# Altium PCB ThermalCamV1_1.PcbDoc
Units mm, origin at the board's own origin, x right, y up, seen from the top; angles counter-clockwise.
Board outline 42.25 x 58 mm, 2 copper layers (Top Layer, Bottom Layer), stack 1.571 mm thick; 11 components, 10 nets, 64 pads, 723 vias.
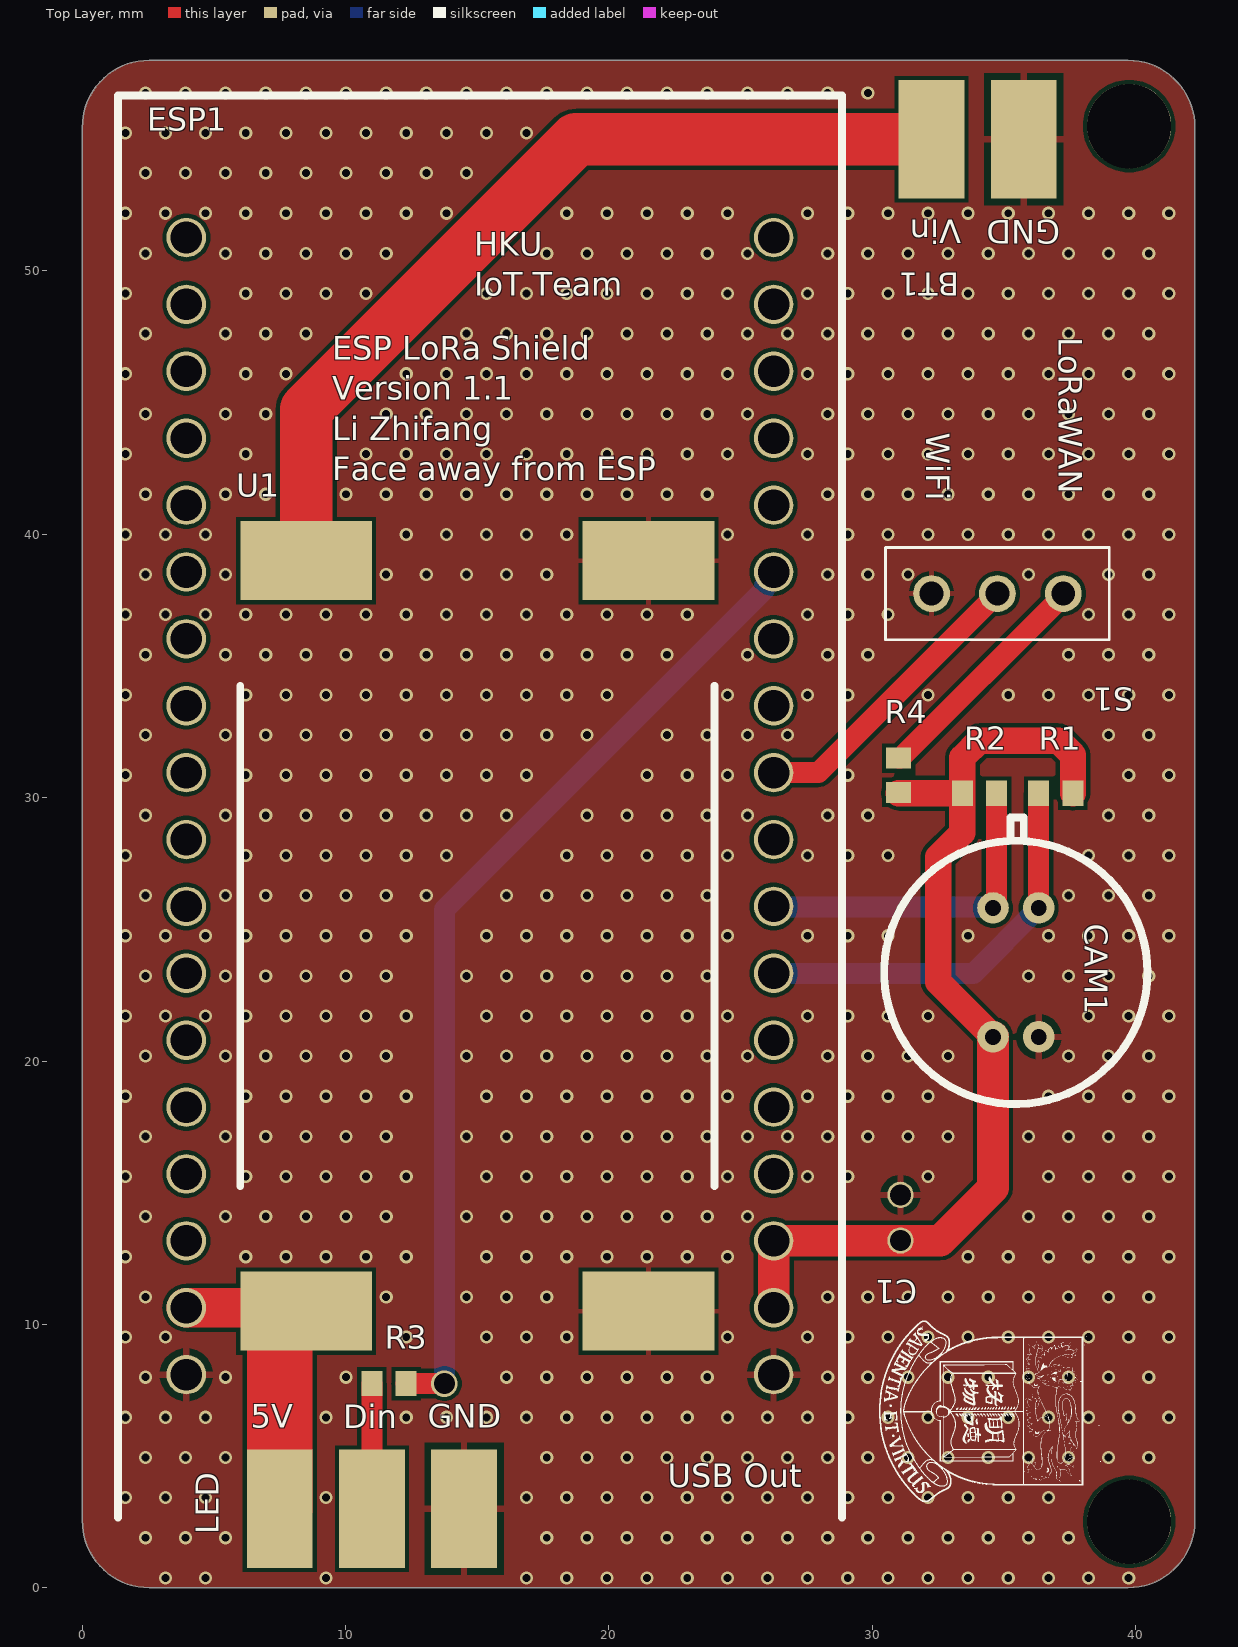
[diagram p0: Top Layer view]
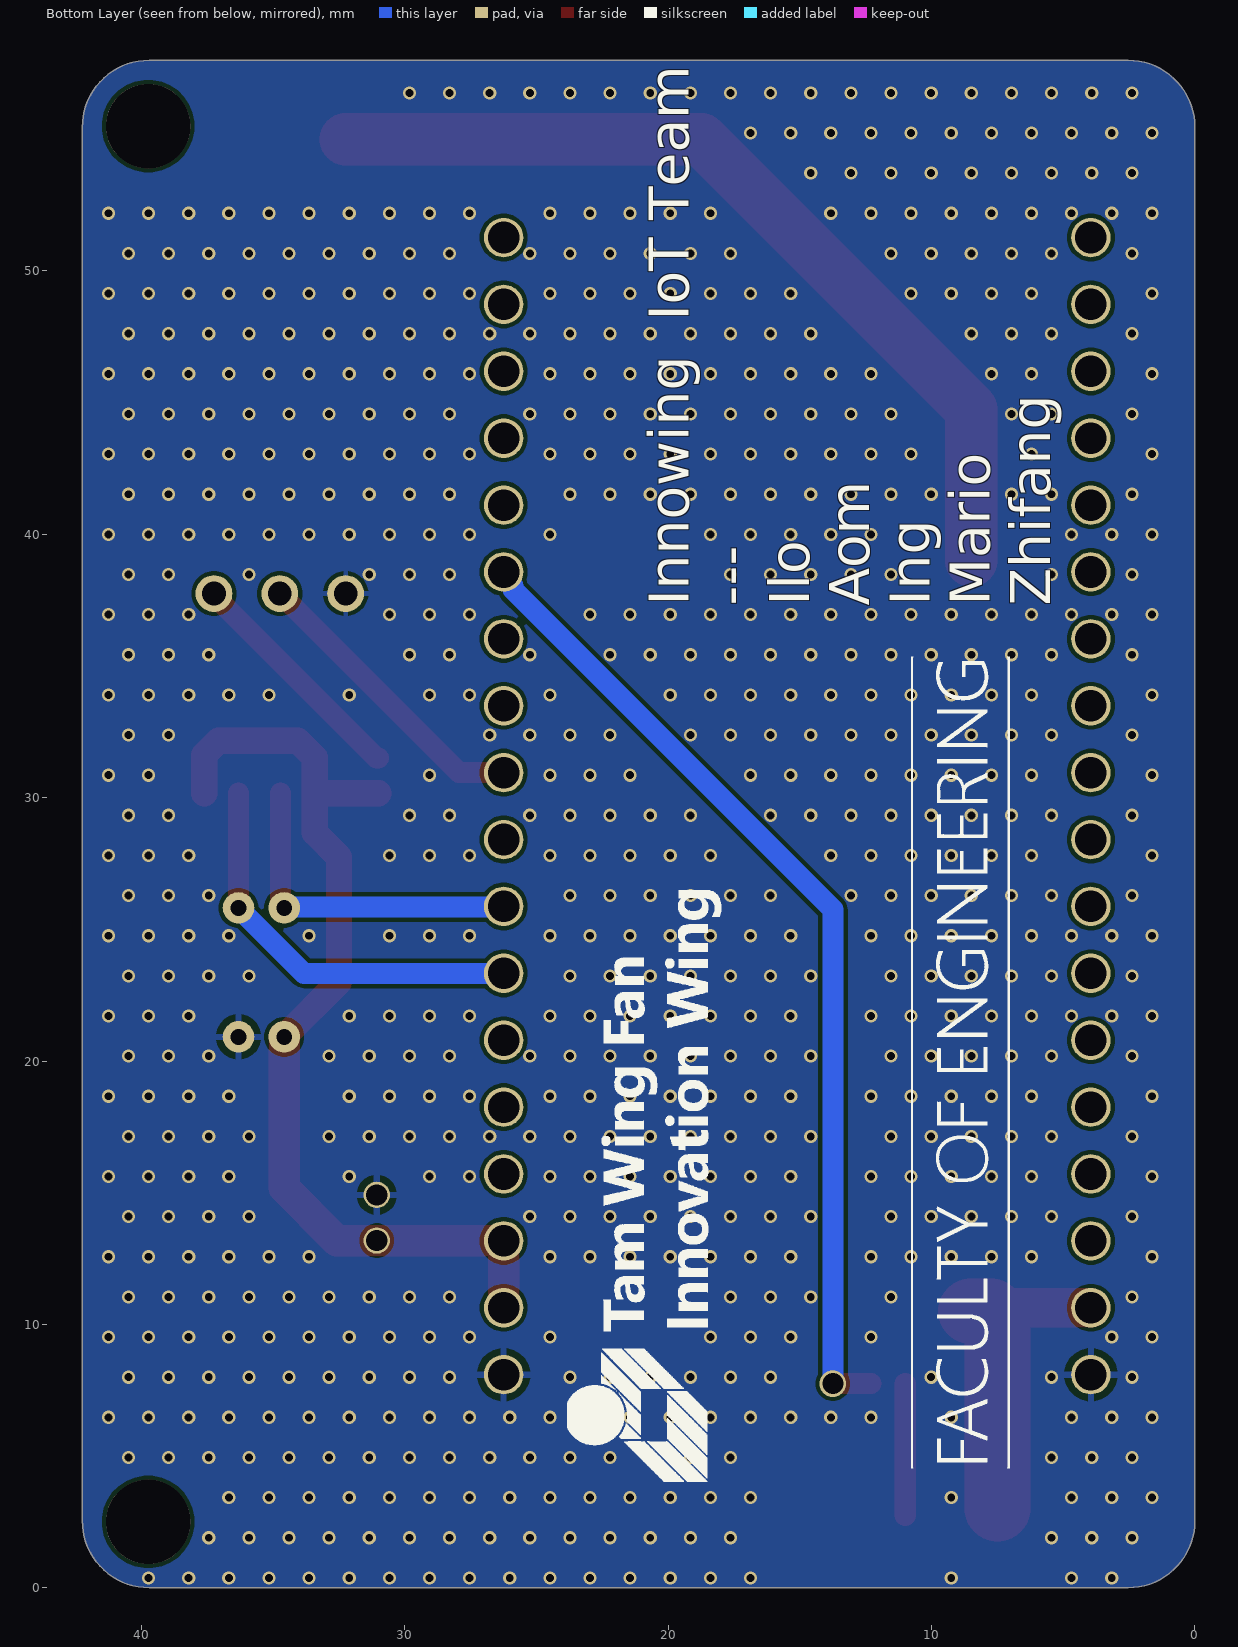
[diagram p1: Bottom Layer view, seen from below]

## Layer stack, top to bottom
Top Solder: solder mask 0.0102, Solder Resist, Dk 3.5
Top Layer: signal copper 0.0356
Dielectric 1: dielectric 1.5, FR-4, Dk 4.8
Bottom Layer: signal copper 0.0356
Bottom Solder: solder mask 0.0102, Solder Resist, Dk 3.5

## Board outline
0,2.54 0,55.46 cw(c2.54,55.46) 2.54,58 39.71,58 cw(c39.71,55.46) 42.25,55.46 42.25,2.54 cw(c39.71,2.54) 39.71,0 2.54,0 cw(c2.54,2.54)

## Design rules (kind name [scope] priority, off if disabled: settings)
Clearance [All] p1: gap=0.15 ignorepadtopadclearanceinfootprint=FALSE
ComponentClearance [All] p1: gap=0 collisioncheckmode=3 verticalgap=0.254 showdistances=FALSE
DiffPairsRouting [All] p1: maxlimit=1 minlimit=0.127 mostfreqgap=0.2 toplayer_minwidth=0.127 toplayer_maxwidth=0.2 toplayer_prefwidth=0.2 bottomlayer_minwidth=0.127 bottomlayer_maxwidth=0.2 bottomlayer_prefwidth=0.2 maxuncoupledlength=12.7
Height ESP_Shield [InComponent('No Component')] p1: minheight=0 maxheight=0 prefheight=0
Height [All] p2: minheight=0 maxheight=500 prefheight=12.7
HoleSize [All] p1: absolutevalues=TRUE maxlimit=6.3 minlimit=0.025 maxpercent=80.000 minpercent=20.000
MinimumSolderMaskSliver [All] p1: minsoldermaskwidth=0.04
PolygonConnect CertainComponents [InComponent('C0','C00') vs InNet('GND')] p1: connectstyle=Direct reliefconductorwidth=0.2 reliefentries=4 polygonreliefangle="90 Angle" airgapwidth=0.2 // force certain component to be conencted with relieft connection
PolygonConnect GND [InNet('GND')] p2: thpad.connectstyle=Relief thpad.reliefconductorwidth=0.2 thpad.reliefentries=4 thpad.polygonreliefangle="90 Angle" thpad.airgapwidth=0.15 smdpad.connectstyle=Relief smdpad.reliefconductorwidth=0.2 smdpad.reliefentries=4 smdpad.polygonreliefangle="90 Angle" smdpad.airgapwidth=0.15 via.connectstyle=Direct via.reliefconductorwidth=0.254 via.reliefentries=4 via.polygonreliefangle="90 Angle" via.airgapwidth=0.254
PolygonConnect [All] p3: connectstyle=Direct reliefconductorwidth=0.3 reliefentries=4 polygonreliefangle="90 Angle" airgapwidth=0.127
RoutingVias [All] p1: holewidth=0.3 width=0.5 viastyle="Through Hole" minholewidth=0.3 minwidth=0.5 maxholewidth=6 maxwidth=6.3
SilkToSilkClearance [All] p1: silktosilkclearance=0.04
SilkToSolderMaskClearance [IsPad] p1: minsilkscreentomaskgap=0.102 clearancetoexposedcopper=TRUE
SolderMaskExpansion [All] p1: expansion=0.102 istentingtop=FALSE
SupplyNets "Schematic Supply Nets_4" [InNet('Vin')] p1: voltage=0.000
SupplyNets "Schematic Supply Nets_3" [InNet('Din')] p2: voltage=0.000
SupplyNets "Schematic Supply Nets_2" [InNet('5V')] p3: voltage=0.000
SupplyNets "Schematic Supply Nets_1" [InNet('GND')] p4: voltage=0.000
SupplyNets "Schematic Supply Nets" [InNet('3V3')] p5: voltage=0.000
Width [All] p1: maxlimit=3 minlimit=0.127 preferedwidth=0.2
23 further rules are at their usual default settings.

## Components (designator, comment, footprint, x,y, rotation, side; value= is the part's Value field where it differs from the comment)
BT1 "Battery Pack" "Battery Pads" 34,55 r0 top
C1 "THT_Capacitor_2.54mm" THT_Capacitor_2.54mm_Small 31.033,14.05 r180 top
CAM1 "MLX90640" MLX90640 35.45,23.365 r90 top
ESP1 "ESP32 LoRa Board" "ESP32 LoRa Board" 15.1,29.67 r0 top
LED "LED Strip" "LED Strip" 11,3 r0 top (schematic designator J1)
R1 "10kΩ 0603" RESC1609X50X30NL8T20 36.967,30.168 r180 top
R2 "10kΩ 0603" RESC1609X50X30NL8T20 34.067,30.168 r180 top
R3 "220Ω 0603" RESC1609X50X30NL8T20 11.65,7.75 r180 top
R4 "10kΩ 0603" RESC1609X50X30NL8T20 31,30.85 r90 top
S1 "SS12D00G3" SS12D00G3 34.75,37.75 r0 top
U1 "Buck Converter" BuckConverter 15,24.75 r270 top

## Footprints (in the part's own frame and the unit in brackets; to place one, negate y for a bottom-side part, rotate by r counter-clockwise, add the part's x,y. Pads: shape width x height; smd on the part's side, far side on the other; paste and mask are expansions set on the pad)
"Battery Pads" [mm]
  rect 2.5x4.5 smd: 1(-1.75,0) 2(1.75,0)
BuckConverter [mm]
  rect 3x5 smd: 1(-14.25,-6.5) 2(-14.25,6.5) 2(14.25,6.5) 3(14.25,-6.5)
  silkscreen extent -9.5,-9 9.5,9
"ESP32 LoRa Board" [mm]
  round 1.5 hole 1.2: 1(11.15,21.6) 2(-11.15,21.6) 3(11.15,19.06) 4(-11.15,19.06) 5(11.15,16.52) 6(-11.15,16.52) 7(11.15,13.98) 8(-11.15,13.98) 9(11.15,11.44) 10(-11.15,11.44) 11(11.15,8.9) 12(-11.15,8.9) 13(11.15,6.36) 14(-11.15,6.36) 15(11.15,3.82) 16(-11.15,3.82) 17(11.15,1.28) 18(-11.15,1.28) 19(11.15,-1.26) 20(-11.15,-1.26) 21(11.15,-3.8) 22(-11.15,-3.8) 23(11.15,-6.34) 24(-11.15,-6.34) 25(11.15,-8.88) 26(-11.15,-8.88) 27(11.15,-11.42) 28(-11.15,-11.42) 29(11.15,-13.96) 30(-11.15,-13.96) 31(11.15,-16.5) 32(-11.15,-16.5) 33(11.15,-19.04) 34(-11.15,-19.04) 35(11.15,-21.58) 36(-11.15,-21.58)
  silkscreen extent -13.75,-27 13.75,27
"LED Strip" [mm]
  rect 2.5x4.5 smd: 1(-3.5,0) 2(0,0) 3(3.5,0)
MLX90640 [mm]
  round 1.2 hole 0.6: 1(-2.448,0.867) 2(-2.448,-0.867) 3(2.448,0.867) 4(2.448,-0.867)
  silkscreen extent -5,-5 5,5
RESC1609X50X30NL8T20 [mm] "Chip Resistor, 2-Leads, Body 1.65x0.95mm, IPC Medium Density"
  rect 0.8x0.95 smd: 1(-0.65,0) 2(0.65,0)
  body extent -0.82,-0.48 0.82,0.48, height 0.5
SS12D00G3 [mm]
  round 1.4 hole 0.9: 1(-2.5,0) 2(0,0) 3(2.5,0)
  silkscreen extent -4.25,-1.75 4.25,1.75, body extent -4.25,-1.75 4.25,1.75, height 6.88
THT_Capacitor_2.54mm_Small [mm]
  round 1 hole 0.8: 1(-0.035,0.867) 2(-0.035,-0.867)

## Part data
R1 R2 R3 R4: library part CMP-2000-03816-5, "Chip Resistor, 0 Ohm, Jumper, 100 mW, -55 to 155 degC, 0603 (1608 Metric), RoHS, Tape and Reel", Manufacturer="Vishay Semiconductor", Max Operating Temperature="155 degC", Min Operating Temperature="-55 degC", Package Quantity=5000, Voltage Rating="75 V", ComponentLink1Description="Manufacturer URL", ComponentLink1URL=http://www.vishay.com/, ComponentLink2Description=Datasheet, ComponentLink2URL=http://www.vishay.com/docs/20035/dcrcwe3.pdf, DatasheetVersion=06/2012, Height="0.45 mm", Length="1.55 mm", Mount="Surface Mount", Mounting Technology="Surface Mount", PackageDescription="2-Pin Surface Mount Device, Body 1.575 x 0.85 mm", PackageReference=0603, Packaging="Tape and Reel", Pins=2, REACH SVHC=Unknown, RoHSCompliant=true
S1: "Switch", Manufacturer_Name=Vimex, Datasheet Link=http://vimex.com/switches/techdocs/SS12D00-tech.pdf, Height=7mm, Manufacturer_Part_Number=SS12D00G3

## Free pads (board coordinates)
  round 3.2 hole 3.2 unplated: 41(39.75,2.5) 42(39.75,55.5)

## Via types
v1: diameter 0.5, hole 0.3, Top Layer to Bottom Layer, tented both sides, 722 vias
v2: diameter 1, hole 0.8, Top Layer to Bottom Layer, tented both sides, 1 vias

## Nets (pads, with @x,y where several pads share a name; then routed paths per layer and width w, separated by ;. In a path a pad name is that pad's centre, name@x,y a point inside that pad or via, vN(x,y) a via of type N, cw(c..) or ccw(c..) an arc to the next point about the centre after c; other vN are vias at no path point)
3V3: C1.1 CAM1.1 ESP1.31 ESP1.33 R1.1 R2.2 R4.1 | length 37.8
  Top Layer w1: R4.1@31,30.168 R2.2 ; CAM1.1 32.5,23 32.5,27.75 33.417,28.667 R2.2 ; R1.1 37.617,31.617 37.067,32.167 34.067,32.167 33.417,31.518 R2.2
  Top Layer w1.2: ESP1.33 ESP1.31 26.263,13.183 C1.1 32.582,13.183 34.583,15.183 ; 34.583,15.25 CAM1.1
5V: ESP1.34 LED.1 U1.3 | length 12.5
  Top Layer w1.5: ESP1.34 U1.3@7.5,10.63 ; U1.3@7.5,9.75 U1.3@7.94,10.19
  Top Layer w2.5: LED.1 7.5,9.75 7.5,10.25 7.75,10.5 U1.3
Din: LED.2 R3.2 | length 5
  Top Layer w0.8: LED.2@11,2.75 LED.2 R3.2
GND: BT1.2 C1.2 CAM1.2 ESP1.35 ESP1.36 LED.3 S1.1 U1.2
  other v1: 3.158,0.374 4.682,0.374 9.254,0.374 16.874,0.374 18.398,0.374 19.922,0.374 21.446,0.374 22.97,0.374 24.494,0.374 26.018,0.374 27.542,0.374 29.066,0.374 30.59,0.374 32.114,0.374 33.638,0.374 35.162,0.374 36.686,0.374 38.21,0.374 39.734,0.374 2.396,1.898 3.92,1.898 5.444,1.898 17.636,1.898 19.16,1.898 20.684,1.898 22.208,1.898 23.732,1.898 25.256,1.898 26.78,1.898 28.304,1.898 29.828,1.898 31.352,1.898 32.876,1.898 34.4,1.898 35.924,1.898 37.448,1.898 1.634,3.422 3.158,3.422 4.682,3.422 9.254,3.422 16.874,3.422 18.398,3.422 19.922,3.422 21.446,3.422 22.97,3.422 24.494,3.422 26.018,3.422 27.542,3.422 29.066,3.422 30.59,3.422 32.114,3.422 33.638,3.422 35.162,3.422 36.686,3.422 2.396,4.946 3.92,4.946 5.444,4.946 17.636,4.946 19.16,4.946 20.684,4.946 22.208,4.946 23.732,4.946 25.256,4.946 26.78,4.946 28.304,4.946 29.828,4.946 31.352,4.946 32.876,4.946 34.4,4.946 35.924,4.946 37.448,4.946 38.972,4.946 40.496,4.946 1.634,6.47 3.158,6.47 4.682,6.47 9.254,6.47 12.302,6.47 13.826,6.47 15.35,6.47 16.874,6.47 18.398,6.47 19.922,6.47 21.446,6.47 22.97,6.47 24.494,6.47 26.018,6.47 27.542,6.47 29.066,6.47 30.59,6.47 32.114,6.47 33.638,6.47 35.162,6.47 36.686,6.47 38.21,6.47 39.734,6.47 41.258,6.47 2.396,7.994 5.444,7.994 10.016,7.994 16.112,7.994 17.636,7.994 19.16,7.994 20.684,7.994 22.208,7.994 23.732,7.994 28.304,7.994 29.828,7.994 31.352,7.994 32.876,7.994 34.4,7.994 35.924,7.994 37.448,7.994 38.972,7.994 40.496,7.994 1.634,9.518 3.158,9.518 12.302,9.518 15.35,9.518 16.874,9.518 18.398,9.518 24.494,9.518 27.542,9.518 29.066,9.518 30.59,9.518 32.114,9.518 33.638,9.518 35.162,9.518 36.686,9.518 38.21,9.518 39.734,9.518 41.258,9.518 2.396,11.042 11.54,11.042 14.588,11.042 16.112,11.042 17.636,11.042 28.304,11.042 29.828,11.042 31.352,11.042 32.876,11.042 34.4,11.042 35.924,11.042 37.448,11.042 38.972,11.042 40.496,11.042 1.634,12.566 6.206,12.566 7.73,12.566 9.254,12.566 10.778,12.566 12.302,12.566 15.35,12.566 16.874,12.566 18.398,12.566 19.922,12.566 21.446,12.566 22.97,12.566 24.494,12.566 33.638,12.566 35.162,12.566 36.686,12.566 38.21,12.566 39.734,12.566 41.258,12.566 2.396,14.09 5.444,14.09 6.968,14.09 8.492,14.09 10.016,14.09 11.54,14.09 14.588,14.09 16.112,14.09 17.636,14.09 19.16,14.09 20.684,14.09 22.208,14.09 23.732,14.09 25.256,14.09 35.924,14.09 37.448,14.09 38.972,14.09 40.496,14.09 1.634,15.614 6.206,15.614 7.73,15.614 9.254,15.614 10.778,15.614 12.302,15.614 15.35,15.614 16.874,15.614 18.398,15.614 19.922,15.614 21.446,15.614 22.97,15.614 24.494,15.614 27.542,15.614 29.066,15.614 32.114,15.614 36.686,15.614 38.21,15.614 39.734,15.614 41.258,15.614 2.396,17.138 5.444,17.138 6.968,17.138 8.492,17.138 10.016,17.138 11.54,17.138 14.588,17.138 16.112,17.138 17.636,17.138 19.16,17.138 20.684,17.138 22.208,17.138 23.732,17.138 25.256,17.138 26.78,17.138 28.304,17.138 29.828,17.138 31.352,17.138 32.876,17.138 35.924,17.138 37.448,17.138 38.972,17.138 40.496,17.138 1.634,18.662 6.206,18.662 7.73,18.662 9.254,18.662 10.778,18.662 12.302,18.662 15.35,18.662 16.874,18.662 18.398,18.662 19.922,18.662 21.446,18.662 22.97,18.662 24.494,18.662 27.542,18.662 29.066,18.662 30.59,18.662 32.114,18.662 36.686,18.662 38.21,18.662 39.734,18.662 41.258,18.662 2.396,20.186 5.444,20.186 6.968,20.186 8.492,20.186 10.016,20.186 11.54,20.186 14.588,20.186 16.112,20.186 17.636,20.186 19.16,20.186 20.684,20.186 22.208,20.186 23.732,20.186 25.256,20.186 28.304,20.186 29.828,20.186 31.352,20.186 32.876,20.186 37.448,20.186 38.972,20.186 40.496,20.186 1.634,21.71 3.158,21.71 4.682,21.71 6.206,21.71 7.73,21.71 9.254,21.71 10.778,21.71 12.302,21.71 15.35,21.71 16.874,21.71 18.398,21.71 19.922,21.71 21.446,21.71 22.97,21.71 24.494,21.71 27.542,21.71 29.066,21.71 30.59,21.71 32.114,21.71 38.21,21.71 39.734,21.71 41.258,21.71 2.396,23.234 5.444,23.234 6.968,23.234 8.492,23.234 10.016,23.234 11.54,23.234 14.588,23.234 16.112,23.234 17.636,23.234 19.16,23.234 20.684,23.234 22.208,23.234 23.732,23.234 35.924,23.234 37.448,23.234 38.972,23.234 40.496,23.234 1.634,24.758 3.158,24.758 4.682,24.758 6.206,24.758 7.73,24.758 9.254,24.758 10.778,24.758 12.302,24.758 15.35,24.758 16.874,24.758 18.398,24.758 19.922,24.758 21.446,24.758 22.97,24.758 24.494,24.758 27.542,24.758 29.066,24.758 30.59,24.758 33.638,24.758 36.686,24.758 38.21,24.758 39.734,24.758 41.258,24.758 2.396,26.282 5.444,26.282 6.968,26.282 8.492,26.282 10.016,26.282 11.54,26.282 13.064,26.282 16.112,26.282 17.636,26.282 19.16,26.282 20.684,26.282 22.208,26.282 23.732,26.282 37.448,26.282 38.972,26.282 40.496,26.282 1.634,27.806 6.206,27.806 7.73,27.806 9.254,27.806 10.778,27.806 12.302,27.806 13.826,27.806 18.398,27.806 19.922,27.806 21.446,27.806 22.97,27.806 24.494,27.806 27.542,27.806 29.066,27.806 30.59,27.806 38.21,27.806 39.734,27.806 41.258,27.806 2.396,29.33 5.444,29.33 6.968,29.33 8.492,29.33 10.016,29.33 11.54,29.33 13.064,29.33 14.588,29.33 16.112,29.33 19.16,29.33 20.684,29.33 22.208,29.33 23.732,29.33 25.256,29.33 28.304,29.33 29.828,29.33 38.972,29.33 40.496,29.33 1.634,30.854 6.206,30.854 7.73,30.854 9.254,30.854 10.778,30.854 12.302,30.854 13.826,30.854 15.35,30.854 16.874,30.854 21.446,30.854 22.97,30.854 24.494,30.854 29.066,30.854 39.734,30.854 41.258,30.854 2.396,32.378 5.444,32.378 6.968,32.378 8.492,32.378 10.016,32.378 11.54,32.378 13.064,32.378 14.588,32.378 16.112,32.378 17.636,32.378 19.16,32.378 22.208,32.378 23.732,32.378 25.256,32.378 26.78,32.378 38.972,32.378 40.496,32.378 1.634,33.902 6.206,33.902 7.73,33.902 9.254,33.902 10.778,33.902 12.302,33.902 13.826,33.902 15.35,33.902 16.874,33.902 18.398,33.902 19.922,33.902 24.494,33.902 27.542,33.902 29.066,33.902 32.114,33.902 35.162,33.902 36.686,33.902 38.21,33.902 39.734,33.902 41.258,33.902 2.396,35.426 5.444,35.426 6.968,35.426 8.492,35.426 10.016,35.426 11.54,35.426 13.064,35.426 14.588,35.426 16.112,35.426 17.636,35.426 19.16,35.426 20.684,35.426 22.208,35.426 25.256,35.426 28.304,35.426 29.828,35.426 37.448,35.426 38.972,35.426 40.496,35.426 1.634,36.95 3.158,36.95 4.682,36.95 6.206,36.95 7.73,36.95 9.254,36.95 10.778,36.95 12.302,36.95 13.826,36.95 15.35,36.95 16.874,36.95 18.398,36.95 19.922,36.95 21.446,36.95 22.97,36.95 27.542,36.95 29.066,36.95 30.59,36.95 38.21,36.95 39.734,36.95 41.258,36.95 2.396,38.474 5.444,38.474 11.54,38.474 13.064,38.474 14.588,38.474 16.112,38.474 17.636,38.474 28.304,38.474 29.828,38.474 31.352,38.474 35.924,38.474 38.972,38.474 40.496,38.474 1.634,39.998 3.158,39.998 4.682,39.998 12.302,39.998 13.826,39.998 15.35,39.998 16.874,39.998 18.398,39.998 24.494,39.998 27.542,39.998 29.066,39.998 30.59,39.998 32.114,39.998 33.638,39.998 35.162,39.998 36.686,39.998 38.21,39.998 39.734,39.998 41.258,39.998 2.396,41.522 5.444,41.522 6.968,41.522 10.016,41.522 11.54,41.522 13.064,41.522 14.588,41.522 16.112,41.522 17.636,41.522 19.16,41.522 20.684,41.522 22.208,41.522 23.732,41.522 28.304,41.522 29.828,41.522 31.352,41.522 32.876,41.522 34.4,41.522 35.924,41.522 37.448,41.522 38.972,41.522 40.496,41.522 1.634,43.046 6.206,43.046 10.778,43.046 12.302,43.046 13.826,43.046 15.35,43.046 16.874,43.046 18.398,43.046 19.922,43.046 21.446,43.046 22.97,43.046 24.494,43.046 27.542,43.046 29.066,43.046 30.59,43.046 32.114,43.046 33.638,43.046 35.162,43.046 36.686,43.046 38.21,43.046 39.734,43.046 41.258,43.046 2.396,44.57 5.444,44.57 6.968,44.57 11.54,44.57 13.064,44.57 14.588,44.57 16.112,44.57 17.636,44.57 19.16,44.57 20.684,44.57 22.208,44.57 23.732,44.57 25.256,44.57 28.304,44.57 29.828,44.57 31.352,44.57 32.876,44.57 34.4,44.57 35.924,44.57 37.448,44.57 38.972,44.57 40.496,44.57 1.634,46.094 6.206,46.094 7.73,46.094 12.302,46.094 13.826,46.094 15.35,46.094 16.874,46.094 18.398,46.094 19.922,46.094 21.446,46.094 22.97,46.094 24.494,46.094 27.542,46.094 29.066,46.094 30.59,46.094 32.114,46.094 33.638,46.094 35.162,46.094 36.686,46.094 38.21,46.094 39.734,46.094 41.258,46.094 2.396,47.618 5.444,47.618 6.968,47.618 8.492,47.618 14.588,47.618 16.112,47.618 17.636,47.618 19.16,47.618 20.684,47.618 22.208,47.618 23.732,47.618 25.256,47.618 26.78,47.618 28.304,47.618 29.828,47.618 31.352,47.618 32.876,47.618 34.4,47.618 35.924,47.618 37.448,47.618 38.972,47.618 40.496,47.618 1.634,49.142 6.206,49.142 7.73,49.142 9.254,49.142 10.778,49.142 15.35,49.142 16.874,49.142 18.398,49.142 19.922,49.142 21.446,49.142 22.97,49.142 24.494,49.142 27.542,49.142 29.066,49.142 30.59,49.142 32.114,49.142 33.638,49.142 35.162,49.142 36.686,49.142 38.21,49.142 39.734,49.142 41.258,49.142 2.396,50.666 5.444,50.666 6.968,50.666 8.492,50.666 10.016,50.666 11.54,50.666 17.636,50.666 19.16,50.666 20.684,50.666 22.208,50.666 23.732,50.666 25.256,50.666 28.304,50.666 29.828,50.666 31.352,50.666 32.876,50.666 34.4,50.666 35.924,50.666 37.448,50.666 38.972,50.666 40.496,50.666 1.634,52.19 3.158,52.19 4.682,52.19 6.206,52.19 7.73,52.19 9.254,52.19 10.778,52.19 12.302,52.19 13.826,52.19 18.398,52.19 19.922,52.19 21.446,52.19 22.97,52.19 24.494,52.19 27.542,52.19 29.066,52.19 30.59,52.19 32.114,52.19 33.638,52.19 35.162,52.19 36.686,52.19 38.21,52.19 39.734,52.19 41.258,52.19 2.396,53.714 3.92,53.714 5.444,53.714 6.968,53.714 8.492,53.714 10.016,53.714 11.54,53.714 13.064,53.714 14.588,53.714 1.634,55.238 3.158,55.238 4.682,55.238 6.206,55.238 7.73,55.238 9.254,55.238 10.778,55.238 12.302,55.238 13.826,55.238 15.35,55.238 16.874,55.238 2.396,56.762 3.92,56.762 5.444,56.762 6.968,56.762 8.492,56.762 10.016,56.762 11.54,56.762 13.064,56.762 14.588,56.762 16.112,56.762 17.636,56.762 19.16,56.762 20.684,56.762 22.208,56.762 23.732,56.762 25.256,56.762 26.78,56.762 28.304,56.762 29.828,56.762
NetCAM1_3: CAM1.3 ESP1.21 R2.1 | length 12.8
  Top Layer w0.8: CAM1.3 34.717,25.948 R2.1
  Bottom Layer w0.8: ESP1.21 26.279,25.841 34.554,25.841 CAM1.3
NetCAM1_4: CAM1.4 ESP1.23 R1.2 | length 15.5
  Top Layer w0.8: CAM1.4 R1.2
  Bottom Layer w0.8: ESP1.23 33.835,23.33 CAM1.4
NetESP1_11: ESP1.11 R3.1 | length 37.4
  Top Layer w0.8: R3.1 v2(13.75,7.75)
  Bottom Layer w0.8: v2(13.75,7.75) 13.75,25.75 25.9,37.9 25.9,38.031 26.25,38.381 ESP1.11
NetESP1_17: ESP1.17 S1.2 | length 11.3
  Top Layer w0.8: ESP1.17 27.95,30.95 S1.2
NetR4_2: R4.2 S1.3 | length 8.9
  Top Layer w0.8: R4.2 31.075,31.5 37.25,37.675 S1.3
Vin: BT1.1 U1.1 | length 33.7
  Top Layer w2: U1.1 8.5,44.75 18.75,55 BT1.1
pads on no net: ESP1.1 ESP1.2 ESP1.3 ESP1.4 ESP1.5 ESP1.6 ESP1.7 ESP1.8 ESP1.9 ESP1.10 ESP1.12 ESP1.13 ESP1.14 ESP1.15 ESP1.16 ESP1.18 ESP1.19 ESP1.20 ESP1.22 ESP1.24 ESP1.25 ESP1.26 ESP1.27 ESP1.28 ESP1.29 ESP1.30 ESP1.32

## Polygon pours and split planes (outlines as drawn)
GND on Top Layer "NONET_L-01_P-001" (solid, pour order 0): 0,2.54 0,55.46 cw(c2.54,55.46) 2.54,58 39.71,58 cw(c39.71,55.46) 42.25,55.46 42.25,2.54 cw(c39.71,2.54) 39.71,0 2.54,0 cw(c2.54,2.54)
GND on Bottom Layer "NONET_L-01_P-001" (solid, pour order 1): 0,2.54 0,55.46 cw(c2.54,55.46) 2.54,58 39.71,58 cw(c39.71,55.46) 42.25,55.46 42.25,2.54 cw(c39.71,2.54) 39.71,0 2.54,0 cw(c2.54,2.54)

## Silkscreen, mask and mechanical layers (free items; w line width, h text height)
Top Overlay:
  drawing of 120 lines, arcs and shapes, not listed
  text "Vin" at 33.37,52.25 h1.52 r180
  text "GND" at 37.133,52.234 h1.52 r180
  text "HKU / IoT Team" at 14.877,48.75 h1.52
  text "LoRaWAN" at 36.766,47.474 h1.52 r270
  text "WiFi" at 31.75,43.864 h1.52 r270
  text "ESP LoRa Shield  / Version 1.1 / Li Zhifang / Face away from ESP" at 9.5,41.75 h1.52
  text "5V" at 6.401,5.766 h1.52
  text "Din" at 9.905,5.75 h1.52
  text "GND" at 13.117,5.766 h1.52
Bottom Overlay:
  drawing of 70 lines, arcs and shapes, not listed
  text "Innowing  IoT Team / --- / Ilo / Aom / Ing / Mario / Zhifang" at 5.5,37.28 h1.52 r270
Mechanical 1:
  lines w0.3: 0,2.54 ccw(c2.54,2.54) 2.54,0 16.75,0 39.71,0 ccw(c39.71,2.54) 42.25,2.54 42.25,10.5 42.25,55.46 ccw(c39.71,55.46) 39.71,58 14,58 12,58 2.54,58 ccw(c2.54,55.46) 0,55.46 0,40 0,2.54

## Text inside footprints (layer, text, board x,y; h text height)
ESP1: Top Overlay "USB Out" at 22.241,3.516 h1.52